# Altium PCB Pinout_Toygether_PCB.PcbDoc
Units mm, origin at the board's own origin, x right, y up, seen from the top; angles counter-clockwise.
Board outline 37.5 x 15 mm, 2 copper layers (Top Layer, Bottom Layer); 7 components, 14 nets, 38 pads, 19 vias.
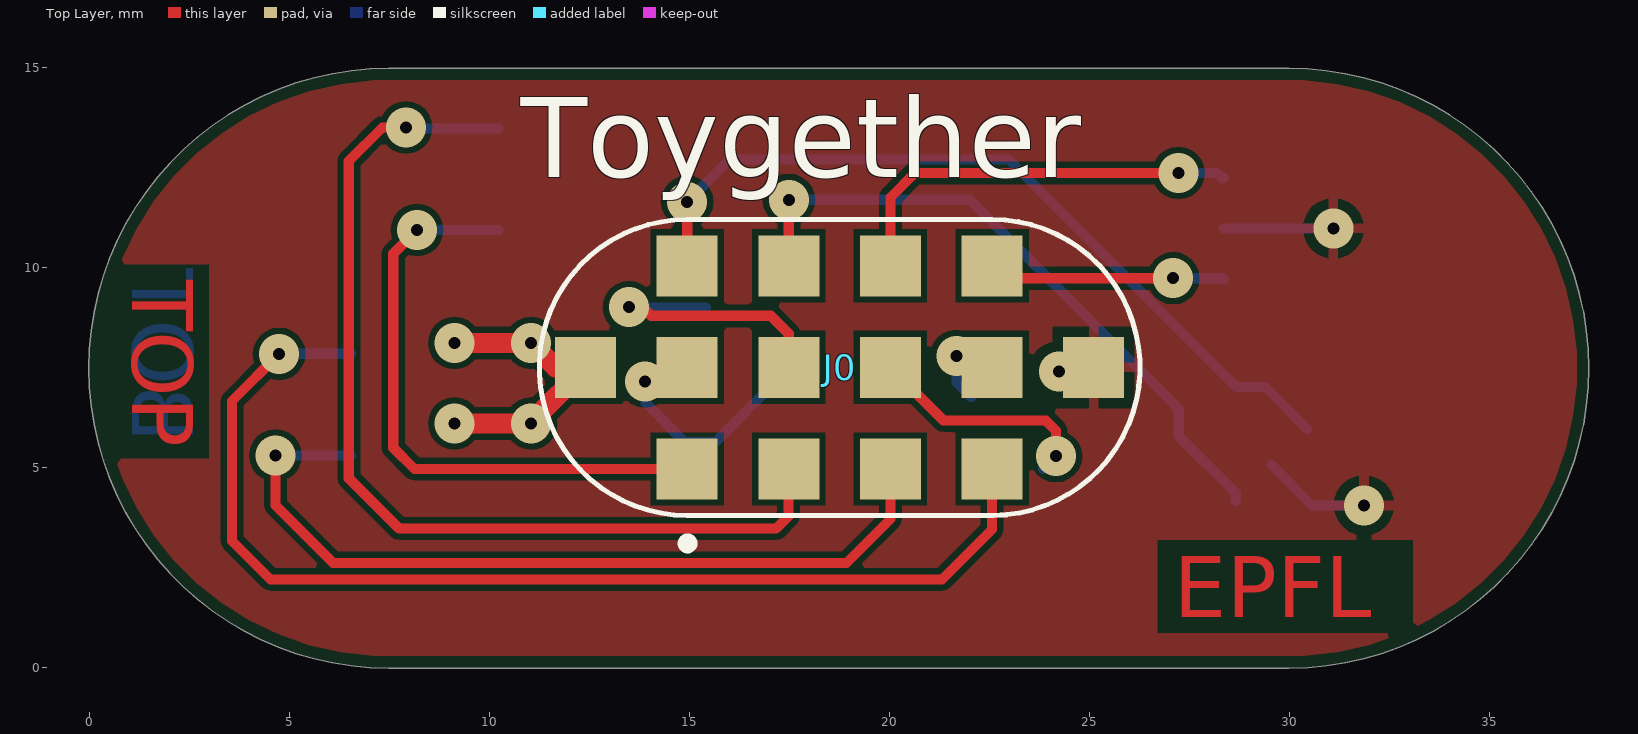
[diagram p0: Top Layer view]
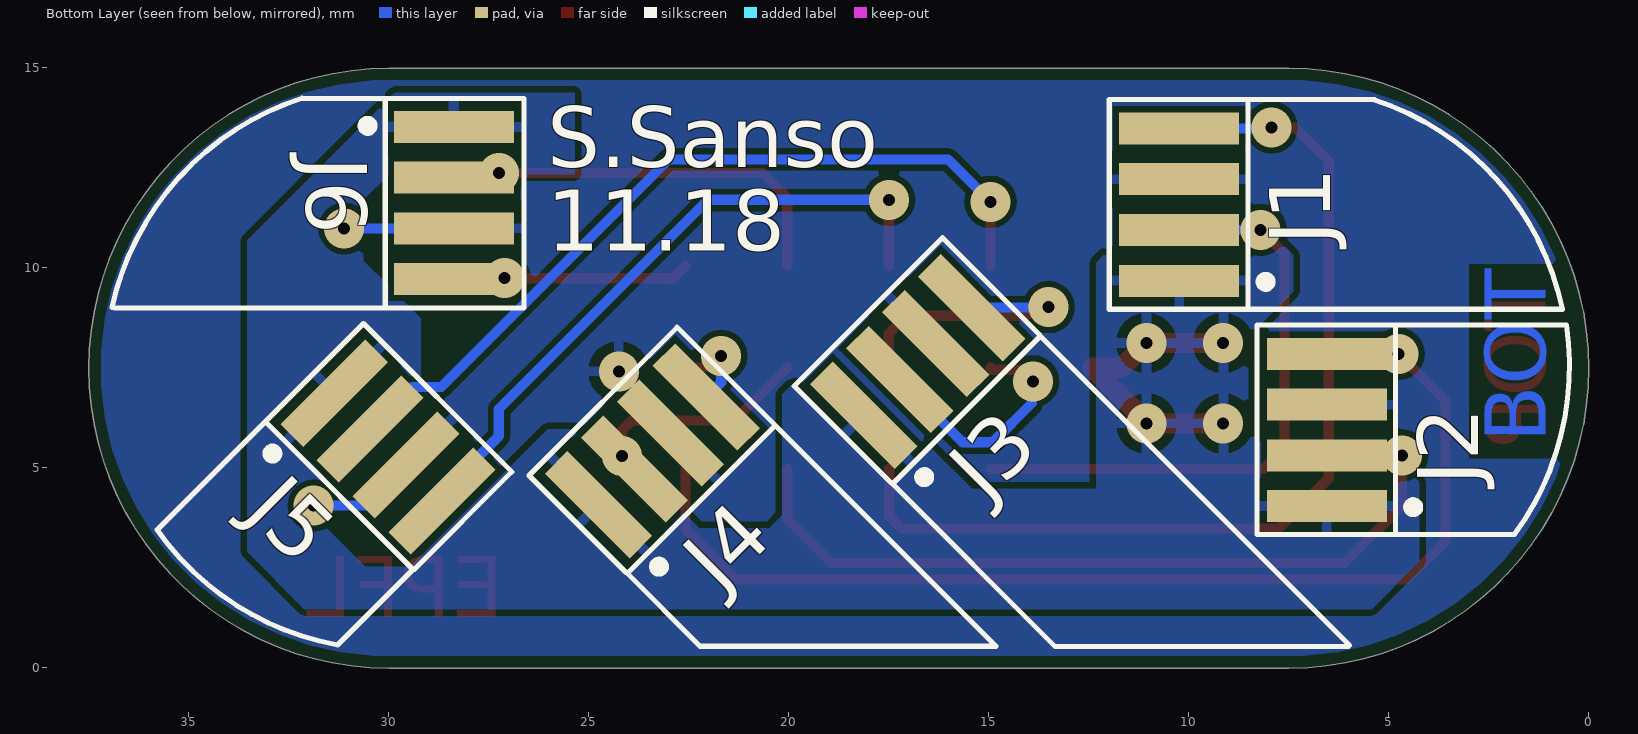
[diagram p1: Bottom Layer view, seen from below]

## Layer stack, top to bottom
Top Solder: solder mask 0.0102, Solder Resist, Dk 3.5
Top Layer: signal copper 0.0356
Dielectric 1: dielectric 0.32, FR-4, Dk 4.8
Bottom Layer: signal copper 0.0356
Bottom Solder: solder mask 0.0102, Solder Resist, Dk 3.5

## Board outline
7.48,-0.02 29.98,-0.02 ccw(c29.98,7.48) 29.98,14.98 7.48,14.98 ccw(c7.48,7.48)

## Design rules (kind name [scope] priority, off if disabled: settings)
BoardOutlineClearance [All] p1: gap=0.3 ignorepadtopadclearanceinfootprint=FALSE
Clearance Clearance_1 [All] p1: gap=0.15 ignorepadtopadclearanceinfootprint=TRUE
HoleSize [All] p1: absolutevalues=TRUE maxlimit=4 minlimit=0.3 maxpercent=80.000 minpercent=20.000
HoleToHoleClearance [All] p1: gap=0.35 allowstackedmicrovias=TRUE
MinimumAnnularRing [All] p1: minimumring=0.15
MinimumSolderMaskSliver [All] p1: minsoldermaskwidth=0.1
PlaneConnect [All] p1: planeconnectstyle=Relief reliefexpansion=0.3 reliefentries=4 reliefconductorwidth=0.2 reliefairgap=0.2
PolygonConnect [All] p1: connectstyle=Relief reliefconductorwidth=0.254 reliefentries=4 polygonreliefangle="90 Angle" airgapwidth=0.254
RoutingVias [All] p1: holewidth=0.5 width=1.2 viastyle="Through Hole" minholewidth=0.3 minwidth=1 maxholewidth=1.5 maxwidth=2.5
SilkToSilkClearance [All] p1 off: silktosilkclearance=0.15
SilkToSolderMaskClearance [IsPad] p1: minsilkscreentomaskgap=0.15 clearancetoexposedcopper=TRUE
SolderMaskExpansion [All] p1: expansion=0.05
UnRoutedNet [All] p1: checkbadconnections=TRUE
Width [All] p1: maxlimit=2 minlimit=0.15 preferedwidth=0.2
23 further rules are at their usual default settings.

## Classes and differential pairs
component class Pinout_Toygether_Sch: J3 J4 J5 J6

## Components (designator, comment, footprint, x,y, rotation, side; value= is the part's Value field where it differs from the comment)
J0 "EXT_CON_PINOUT" EXT_CON_PINOUT_14P 18.75,7.5 r0 top
J1 "EXT_CON_WIRES" EXT_CON_WIRES_4P 10.22,11.57 r90 bottom
J2 "EXT_CON_WIRES" EXT_CON_WIRES_4P 6.53,5.935 r90 bottom
J3 "EXT_CON_WIRES" EXT_CON_WIRES_4P 16.757,7.648 r135 bottom
J4 "EXT_CON_WIRES" EXT_CON_WIRES_4P 23.389,5.411 r135 bottom
J5 "EXT_CON_WIRES" EXT_CON_WIRES_4P 29.999,5.509 r225 bottom
J6 "EXT_CON_WIRES" EXT_CON_WIRES_4P 28.35,11.61 r270 bottom

## Footprints (in the part's own frame and the unit in brackets; to place one, negate y for a bottom-side part, rotate by r counter-clockwise, add the part's x,y. Pads: shape width x height; smd on the part's side, far side on the other; paste and mask are expansions set on the pad)
EXT_CON_PINOUT_14P [mil]
  rect 60x60 smd: 1(-150,-100) 2(-50,-100) 3(50,-100) 4(150,-100) 5(-150,0) 6(-50,0) 7(50,0) 8(150,0) 9(-150,100) 10(-50,100) 11(50,100) 12(150,100) 13(-250,0) 14(250,0)
  silkscreen extent -296,-178 296,146
EXT_CON_WIRES_4P [mm]
  rect 0.8x3 smd: 1(-1.905,0) 2(-0.635,0) 3(0.635,0) 4(1.905,0)
  silkscreen extent -2.62,-2.28 2.62,1.75

## Part data
J0: "Pinout for the LEDs and capacitive touch sensors (on the plush toy)"
J1 J2 J3 J4 J5 J6: "Pads between pinout board and wires of the plush toy"

## Via types
v1: diameter 1, hole 0.3, Top Layer to Bottom Layer, 19 vias

## Nets (pads, with @x,y where several pads share a name; then routed paths per layer and width w, separated by ;. In a path a pad name is that pad's centre, name@x,y a point inside that pad or via, vN(x,y) a via of type N, cw(c..) or ccw(c..) an arc to the next point about the centre after c; other vN are vias at no path point)
5V: J0.13 J1.1 J2.1 J3.1 J4.1 J5.1 J6.1 | length 8.9
  Top Layer w0.254: 9.843,6.19 11.09,6.19 11.143,6.19 v1@10.991,6.039
  Top Layer w0.5: v1(9.12,6.1) v1(11.04,6.1) 11.04,6.14 11.09,6.19 J0.13 11.65,7.5 v1(11.04,8.11) v1(9.12,8.11)
GND: J0.14 J1.3 J2.3 J3.3 J4.3 J5.3 J6.3 | length 5.5
  Bottom Layer w0.254: J6.3 v1(31.095,10.975) ; J5.3 30.56,4.05 v1(31.86,4.05)
  other v1: 24.23,7.4
nOUT_LED1: J0.1 J1.2 | length 15.3
  Top Layer w0.254: v1(8.185,10.935) 7.59,10.34 7.59,5.49 8.12,4.96 J0.1
  Bottom Layer w0.254: v1(8.185,10.935) J1.2
nOUT_LED2: J0.3 J2.2 | length 20.8
  Top Layer w0.254: v1(4.648,5.297) 4.648,4.052 6.09,2.61 18.92,2.61 20.02,3.71 J0.3
  Bottom Layer w0.254: v1(4.648,5.297) 4.65,5.3 J2.2
nOUT_LED3: J0.5 J3.2 | length 6.9
  Top Layer w0.254: v1(13.88,7.153) 13.88,7.41 13.91,7.44 14.88,7.44 J0.5
  Bottom Layer w0.254: v1(13.88,7.153) 13.88,7.43 13.91,7.46 13.9,7.47 13.9,6.61 14.88,5.63 15.637,5.63 J3.2
nOUT_LED4: J0.7 J4.2 | length 5.9
  Top Layer w0.254: J0.7 21.35,6.17 23.91,6.17 24.156,5.924 v1(24.156,5.28)
  Bottom Layer w0.254: J4.2 v1(24.156,5.28)
nOUT_LED5: J0.9 J5.2 | length 20.3
  Top Layer w0.254: J0.9 v1(14.94,11.64)
  Bottom Layer w0.254: v1(14.94,11.64) 15.998,12.698 22.98,12.698 28.669,7.009 29.397,7.009 J5.2
nOUT_LED6: J0.11 J6.2 | length 10.4
  Top Layer w0.254: J0.11 20.02,11.75 20.63,12.36 v1(27.22,12.36)
  Bottom Layer w0.254: v1(27.22,12.36) 28.185,12.36 28.325,12.22 J6.2
Z1: J0.2 J1.4 | length 25.2
  Top Layer w0.254: v1@8.21,13.55 8.16,13.5 v1(7.91,13.5) 7.32,13.5 6.48,12.66 6.48,4.73 7.74,3.47 17.16,3.47 17.47,3.78 17.47,4.95 J0.2
  Bottom Layer w0.254: v1(7.91,13.5) 7.935,13.475 J1.4
Z2: J0.4 J2.4 | length 28.4
  Top Layer w0.254: v1(4.74,7.84) 3.56,6.66 3.56,3.16 4.52,2.2 21.31,2.2 22.56,3.45 J0.4
  Bottom Layer w0.254: v1(4.74,7.84) J2.4
Z3: J0.6 J3.4 | length 7
  Top Layer w0.254: v1(13.485,9.005) 13.825,9.005 14.04,8.79 17.03,8.79 17.48,8.34 J0.6
  Bottom Layer w0.254: v1(13.485,9.005) 13.485,8.995 J3.4
Z4: J0.8 J4.4 | length 2.4
  Top Layer w0.254: v1(21.67,7.787) 21.67,7.924 22.094,7.5 J0.8
  Bottom Layer w0.254: v1(21.67,7.787) 21.67,7.13 J4.4
Z5: J0.10 J5.4 | length 16.5
  Top Layer w0.254: J0.10 v1(17.48,11.69)
  Bottom Layer w0.254: v1(17.48,11.69) 22,11.69 27.23,6.46 27.23,5.782 28.652,4.36 J5.4
Z6: J0.12 J6.4 | length 5.9
  Top Layer w0.254: J0.12 22.895,9.705 22.92,9.73 v1(27.09,9.73)
  Bottom Layer w0.254: v1(27.09,9.73) 28.325,9.73 J6.4

## Polygon pours and split planes (outlines as drawn)
5V on Bottom Layer "Bottom Layer-5V" (solid, remove dead copper, pour order 22): 4.22,2.65 4.22,4.64 4.98,5.4 7.95,5.4 8.49,5.94 8.49,8.29 8.48,8.28 7.37,9.39 7.37,10.31 7.9,10.84 11.58,10.84 12.3,10.12 12.3,4.47 15.4,4.47 18.87,7.94 19.03,7.94 20.14,6.83 20.14,3.81 20.47,3.48 22.22,3.48 24.7,5.96 26.01,5.96 29.45,2.52 30.57,2.52 31.52,3.47 31.52,4.86 29.18,7.2 29.18,8.73 30.62,10.17 30.62,11.69 29.98,12.33 25.33,12.33 25.33,14.37 29.83,14.37 30.38,13.82 30.815,13.385 33.52,10.68 33.52,2.89 32.09,1.46 5.41,1.46
GND on Bottom Layer "Bottom Layer-GND" (solid, remove dead copper, pour order 23): 7.48,-0.02 29.98,-0.02 ccw(c29.98,7.48) 29.98,14.98 7.48,14.98 ccw(c7.48,7.48)
GND on Top Layer "Top Layer-GND" (solid, remove dead copper, pour order 24): 7.48,-0.02 29.98,-0.02 ccw(c29.98,7.48) 29.98,14.98 7.48,14.98 ccw(c7.48,7.48)

## Other copper
Top Layer:
  text "TOP" at 1.06,9.68 h1.52 r270
  text "EPFL" at 27.1,1.26 h1.52
Bottom Layer:
  text "BOT" at 1.06,5.62 h1.52 r270

## Silkscreen, mask and mechanical layers (free items; w line width, h text height)
Top Overlay:
  text "Toygether" at 10.78,12.25 h2
Bottom Overlay:
  lines w0.127: 0.543,8.561 ccw(c7.51,7.51) 1.844,3.321 1.845,3.32 4.77,3.32 4.85,3.32 ; 0.547,8.56 4.82,8.56 ; 5.342,14.188 ccw(c7.5,7.52) 0.64,8.955 8.54,8.955 ; 5.342,14.195 8.55,14.195 ; 5.96,0.55 13.677,8.267 ; 5.99,0.52 13.28,0.52 13.32,0.52 17.415,4.615 ; 20.307,6.037 14.8,0.53 22.2,0.53 24.047,2.377 ; 29.373,2.451 31.262,0.562 ccw(c30,7.51) 35.772,3.441 ; 30.03,14.225 32.15,14.23 cw(c29.99,7.5) 36.897,8.997 ; 30.05,8.985 36.84,8.985 ; 33.036,6.17 35.748,3.458
  text "S.Sanso" at 26.02,12.5 h1.52
  text "11.18" at 26.03,10.42 h1.52
Mechanical 1:
  lines w0.127: -0.01,7.47 0,7.46 0,0.01 ; 0,7.5 37.5,7.5 ; 0.03,-0.02 7.48,-0.02 ; 7.5,0 cw(c7.5,7.5) 7.5,15 ; 7.5,0 7.5,15 ; 7.5,0 30,0 ; 7.5,15 30,15 ; 30,0 ccw(c30,7.5) 30,15 ; 30,0 30,15
Mechanical 2:
  lines w0.127: 8.48,8.28 7.37,9.39 7.37,10.31 7.9,10.84 9.3,10.84 11.58,10.84 12.3,10.12 12.3,4.47 15.4,4.47 18.87,7.94 19.03,7.94 20.14,6.83 20.14,3.81 20.47,3.48 22.22,3.48 24.7,5.96 26.01,5.96 29.45,2.52 30.57,2.52 31.52,3.47 31.52,4.86 29.18,7.2 29.18,8.73 30.62,10.17 30.62,11.69 29.98,12.33 25.33,12.33 25.33,14.37 29.83,14.37 30.38,13.82 30.815,13.385 33.52,10.68 33.52,2.89 32.09,1.46 5.41,1.46 4.22,2.65 4.22,4.64 4.98,5.4 7.95,5.4 8.49,5.94 8.49,8.29